# EAGLE board SBC-Prototype (EAGLE 5.06)

Size 100 x 80 mm. Coordinates in mm from the lower left corner, seen from the top.
Outline: 0,0 100,0 100,80 0,80 0,0
Copper layers (1*16): Top 0.035mm / dielectric 1.5mm / Bottom 0.035mm
Design rules "default": minimum track width 10mil, minimum drill 24mil, track to track 8mil, track to pad 8mil, pad to pad 8mil, via to via 8mil, smd to smd 8mil, copper to edge 40mil, drill to drill 8mil, minimum pad ring 10mil, minimum via ring 8mil, stop-mask expansion 4mil, vias tented up to drill 0mil, thermal gap 10mil
Holes 8 mm at -1.4,45.72

## Footprints (pad centres in the part's own frame; a part is rotated, then mirrored left to right if it is on the bottom)
3,0 = hole 3: 0,0
4,1 = hole 4.1: 0,0
SBC-DAUGHTER = drill 1.016 octagon: P$1 26.67,-24.13; P$2 24.13,-24.13; P$3 26.67,-21.59; P$4 24.13,-21.59; P$5 26.67,-19.05; P$6 24.13,-19.05; P$7 26.67,-16.51; P$8 24.13,-16.51; P$9 26.67,-13.97; P$10 24.13,-13.97; P$11 26.67,-11.43; P$12 24.13,-11.43; P$13 26.67,-8.89; P$14 24.13,-8.89; P$15 26.67,-6.35; P$16 24.13,-6.35; P$17 26.67,-3.81; P$18 24.13,-3.81; P$19 26.67,-1.27; P$20 24.13,-1.27; P$21 26.67,1.27; P$22 24.13,1.27; P$23 26.67,3.81; P$24 24.13,3.81; P$25 -24.13,-24.13; P$26 -26.67,-24.13; P$27 -24.13,-21.59; P$28 -26.67,-21.59; P$29 -24.13,-19.05; P$30 -26.67,-19.05; P$31 -24.13,-16.51; P$32 -26.67,-16.51; P$33 -24.13,-13.97; P$34 -26.67,-13.97; P$35 -24.13,-11.43; P$36 -26.67,-11.43; P$37 -24.13,-8.89; P$38 -26.67,-8.89; P$39 -24.13,-6.35; P$40 -26.67,-6.35; P$41 -24.13,-3.81; P$42 -26.67,-3.81; P$43 -24.13,-1.27; P$44 -26.67,-1.27; P$45 -24.13,1.27; P$46 -26.67,1.27; P$47 -24.13,3.81; P$48 -26.67,3.81

## Placement (x,y rotation side)
H1  MOUNT-HOLE3.0  [3,0]  94,15.24 0 top
H2  MOUNT-HOLE3.0  [3,0]  14,15.24 0 top
H3  MOUNT-HOLE3.0  [3,0]  94,75.25 0 top
H4  MOUNT-HOLE3.0  [3,0]  14,75.25 0 top
H5  MOUNT-HOLE4.1  [4,1]  31.77,40.64 0 top
SBC  [SBC-DAUGHTER]  31.77,63.5 0 top

## Library data of the parts
H1-H5 = holes
SBC = modtronix